# Altium PCB SDP_V2.0.PcbDoc (part 2 of 3)
Units mm, origin at the board's own origin, x right, y up, seen from the top; angles counter-clockwise.
Board outline 64 x 80 mm, 4 copper layers (Top Layer, Ground Plane, Power Plane, Bottom Layer), stack 1.466 mm thick; 154 components, 87 nets, 480 pads, 931 vias.
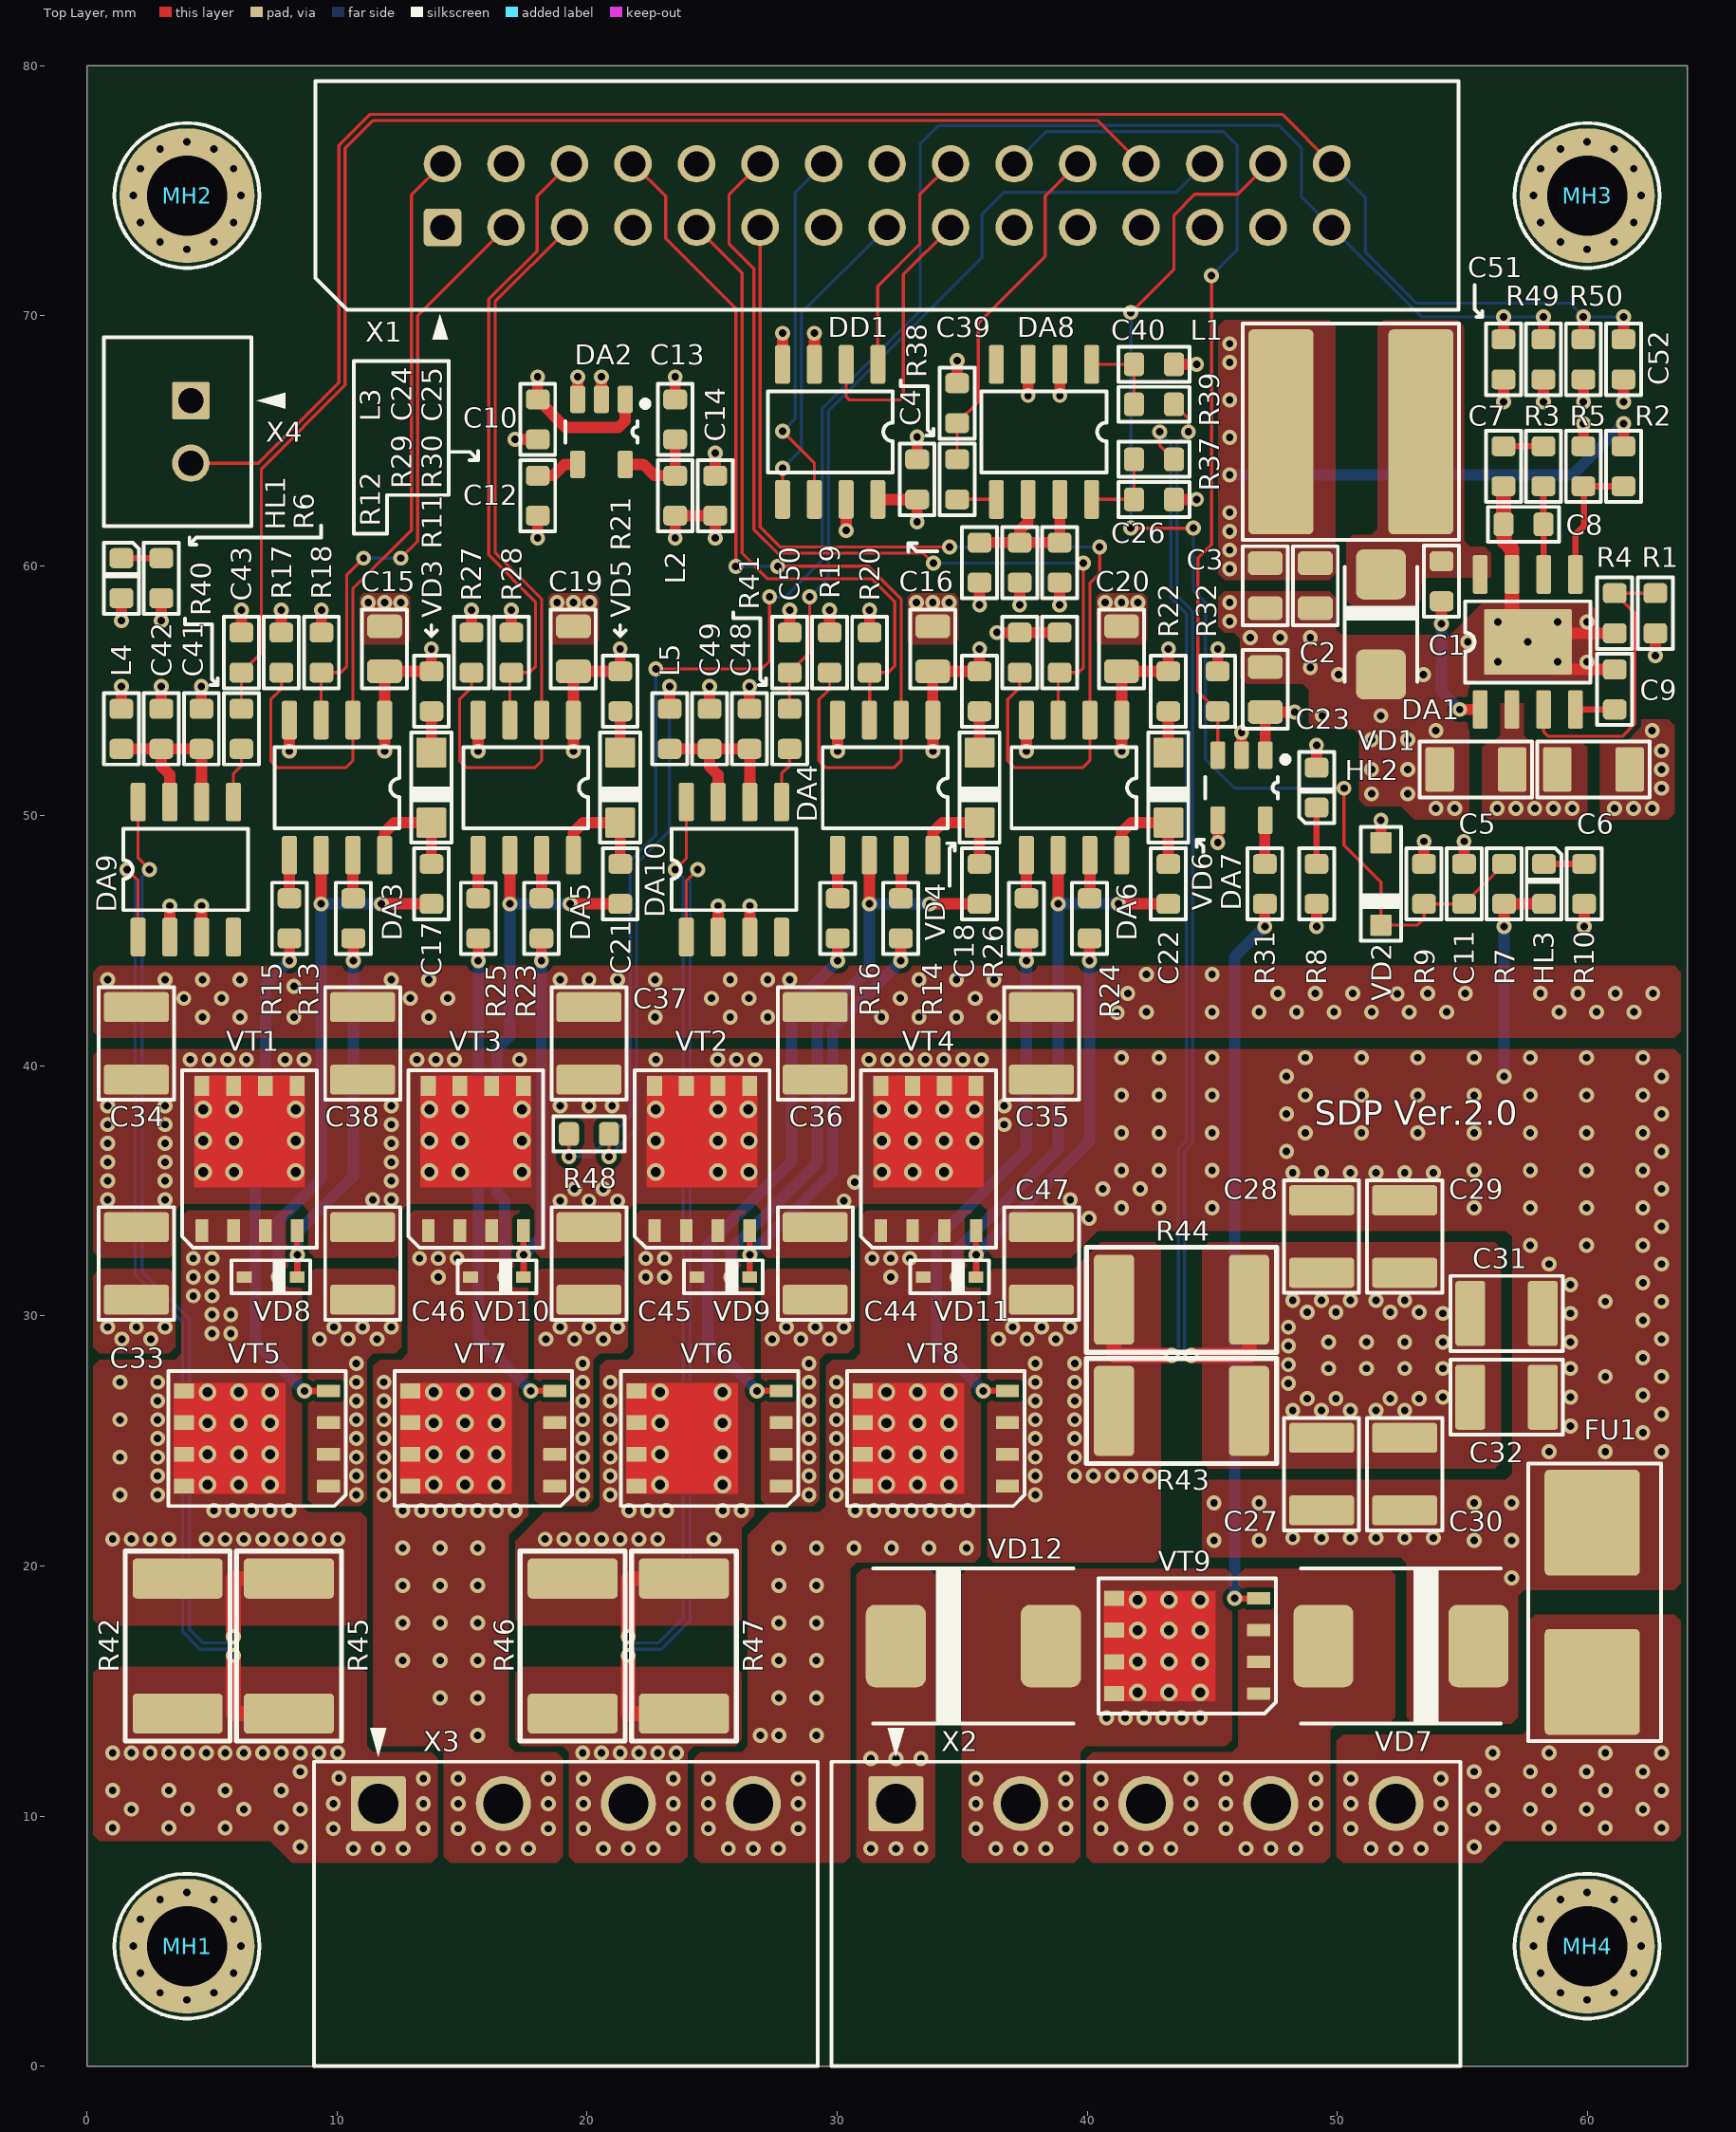
[diagram p0: Top Layer view]

## Via types
v1: diameter 0.6, hole 0.3, Top Layer to Bottom Layer, tented both sides, 789 vias
v2: diameter 0.7, hole 0.4, Top Layer to Bottom Layer, tented both sides, 94 vias
v3: diameter 0.6, hole 0.3, Top Layer to Bottom Layer, 48 vias

## Nets (pads, with @x,y where several pads share a name; then routed paths per layer and width w, separated by ;. In a path a pad name is that pad's centre, name@x,y a point inside that pad or via, vN(x,y) a via of type N, cw(c..) or ccw(c..) an arc to the next point about the centre after c; other vN are vias at no path point) (continued)
GND: (continued)
  other v1: 41.35,8.7 42.35,8.7 43.35,8.7 46.35,8.7 47.35,8.7 48.35,8.7 40.55,9.5 44.15,9.5 45.55,9.5 49.15,9.5 40.55,10.5 44.15,10.5 45.55,10.5 49.15,10.5 40.55,11.5 44.15,11.5 45.55,11.5 49.15,11.5 48.225,26.225 49.375,26.225 50.525,26.225 51.55,26.225 52.7,26.225 48.8,26.7 49.95,26.7 52.125,26.7 53.275,26.7 54.225,26.75 48.05,27.3 49.65,27.9 51.175,27.9 52.7,27.9 54.225,27.9 48.05,28.05 48.05,28.8 49.65,28.95 51.175,28.95 52.7,28.95 54.225,28.95 1.4,29.075 2.55,29.075 0.825,29.55 1.975,29.55 3.125,29.55 48.05,29.55 54.225,30.1 48.8,30.15 49.95,30.15 52.125,30.15 53.275,30.15 48.225,30.625 49.375,30.625 50.525,30.625 51.55,30.625 52.7,30.625 4.625,41.95 6.125,41.95 8.275,41.95 13.675,41.95 22.725,41.95 25.725,41.95 27.225,41.95 31.775,41.95 33.275,41.95 34.775,41.95 36.275,41.95 41.2,42.125 42.375,42.15 45,42.15 46.875,42.15 48.375,42.15 49.875,42.15 51.375,42.15 52.875,42.15 54.375,42.15 58.875,42.15 60.375,42.15 61.875,42.15 3.875,42.7 5.375,42.7 12.925,42.7 14.425,42.7 24.975,42.7 26.475,42.7 32.525,42.7 35.525,42.7 52.4,42.875 41.625,42.9 47.625,42.9 49.125,42.9 50.625,42.9 53.625,42.9 55.125,42.9 58.125,42.9 59.625,42.9 61.125,42.9 62.625,42.9 8.275,43.175 0.825,43.45 3.125,43.45 4.625,43.45 6.125,43.45 12.175,43.45 13.675,43.45 18.925,43.45 20.075,43.45 21.225,43.45 22.725,43.45 25.725,43.45 27.225,43.45 28.1,43.45 33.275,43.45 34.775,43.45 36.275,43.45 42.375,43.65 45,43.65 53.95,50.3 54.7,50.3 61.1,50.3 61.85,50.3 62.6,50.3 51.375,50.875 52.825,50.875 62.975,51.1 51.375,51.85 52.825,51.85 62.975,51.85 62.975,52.6 51.375,53.05 52.825,53.05 53.95,53.4 62.6,53.4 49.4,54 51.75,54 50.05,55.65 53.45,55.65 48.925,55.925 56.425,56.15 58.825,56.15 60,56.15 55.225,56.95 46.525,57.125 47.725,57.125 48.925,57.125 56.425,57.75 58.825,57.75 60,57.75 45.7,57.775 11.25,58.525 11.9,58.525 12.55,58.525 18.8,58.525 19.45,58.525 20.1,58.525 33.175,58.525 33.825,58.525 34.475,58.525 40.725,58.525 41.375,58.525 42.025,58.525 45.7,58.525
  other v3: 4,2.65 60,2.65 2.925,2.938 5.075,2.938 58.925,2.938 61.075,2.938 2.138,3.725 5.862,3.725 58.138,3.725 61.862,3.725 1.85,4.8 6.15,4.8 57.85,4.8 62.15,4.8 2.138,5.875 5.862,5.875 58.138,5.875 61.862,5.875 2.925,6.662 5.075,6.662 58.925,6.662 61.075,6.662 4,6.95 60,6.95 4,72.65 60,72.65 2.925,72.938 5.075,72.938 58.925,72.938 61.075,72.938 2.138,73.725 5.862,73.725 58.138,73.725 61.862,73.725 1.85,74.8 6.15,74.8 57.85,74.8 62.15,74.8 2.138,75.875 5.862,75.875 58.138,75.875 61.862,75.875 2.925,76.662 5.075,76.662 58.925,76.662 61.075,76.662 4,76.95 60,76.95
I0_P: C43.2 R40.1 X1.24 X5.24 | length 57.1
  Top Layer w0.125: R40.1@6.175,54.275 C43.2@6.175,55.725 6.975,56.525 6.975,63.871 10.325,67.221 10.325,67.425 10.325,76.696 11.429,77.8 40.43,77.8 X1.24@42.16,76.07
I1_P: C50.2 R41.1 X1.26 X5.26 | length 32.7
  Top Layer w0.125: R41.1@28.1,54.275 C50.2@28.1,55.725 28.9,56.525 v1(28.9,58.75)
  Bottom Layer w0.125: v1(28.9,58.75) 29.65,59.5 29.65,66.175 35.8,72.325 35.8,74.05 36.675,74.925 43.555,74.925 X1.26@44.7,76.07
I_BOT_N: NT4.1 R39.2 | length 38.3
  Top Layer w0.125: R39.2@43.475,66.45 44.05,65.875 v1(44.05,65.35)
  Bottom Layer w0.125: NT4.1@43.9,28.925 43.9,36.577 44.225,36.902 44.225,58.179 43.6,58.804 43.6,64.9 v1(44.05,65.35)
I_BOT_P: NT1.1 R37.2 | length 38.3
  Top Layer w0.125: v1(42.9,65.35) 42.9,64.825 R37.2@43.475,64.25
  Bottom Layer w0.125: v1(42.9,65.35) 43.35,64.9 43.35,58.7 43.975,58.075 43.975,37.005 43.65,36.68 NT1.1@43.65,28.925
I_common: C39.2 R38.1 X1.22 X5.22 | length 13.8
  Top Layer w0.125: R38.1@34.8,64.25 C39.2@34.8,65.7 35.65,66.55 35.65,69.7 38.325,72.375 38.325,74.775 X1.22@39.62,76.07
I_PH_X1_N: DA9.1 NT3.1 | length 36.1
  Top Layer w0.125: v1(1.6,47.85) 2.045,47.405 DA9.1@2.045,45.15
  Bottom Layer w0.125: v1(1.6,47.85) 1.925,47.525 1.925,31.65 3.825,29.75 3.825,17.375 4.525,16.675 NT3.1@5.35,16.675
I_PH_X1_P: DA9.8 NT2.2 | length 35.7
  Top Layer w0.125: DA9.8@2.045,50.55 2.045,48.305 v1(2.5,47.85)
  Bottom Layer w0.125: v1(2.5,47.85) 2.2,47.55 2.2,31.775 4.1,29.875 4.1,17.475 4.65,16.925 NT2.2@5.35,16.925
I_PH_Y1_N: DA10.1 NT6.1 | length 35.5
  Top Layer w0.125: DA10.1@23.97,45.15 23.97,47.395 v1(24.425,47.85)
  Bottom Layer w0.125: NT6.1@22.15,16.675 22.975,16.675 24.125,17.825 24.125,47.55 v1(24.425,47.85)
I_PH_Y1_P: DA10.8 NT5.2 | length 35.1
  Top Layer w0.125: v1(23.525,47.85) 23.97,48.295 DA10.8@23.97,50.55
  Bottom Layer w0.125: NT5.2@22.15,16.925 22.85,16.925 23.85,17.925 23.85,47.525 v1(23.525,47.85)
MP_UX1: C17.2 DA3.6 NT2.1 R42.2 R45.2 VD8.2 VT1.1 VT1.2 VT1.3 VT5.5 VT5.6 VT5.7 VT5.8 | length 26.9
  Top Layer w0.45: v1(9.365,46.475) DA3.6@9.365,48.425 ; v1(11.775,46.475) C17.2@13.775,46.475
  Top Layer w0.6: v1(5.85,17.175) 5.85,19.5 R45.2@8.075,19.5
  Bottom Layer w0.125: NT2.1@5.6,16.925 v1(5.85,17.175)
  Bottom Layer w0.45: v1(7.65,31.55) 7.65,33.775 9.365,35.49 v1(9.365,46.475) v1(11.775,46.475)
  other v1: 1.025,21.075 1.775,21.075 2.525,21.075 3.275,21.075 4.775,21.075 5.525,21.075 6.275,21.075 7.025,21.075 7.775,21.075 8.525,21.075 9.275,21.075 10.025,21.075 5.075,22.225 5.825,22.225 6.575,22.225 7.325,22.225 8.075,22.225 1.325,22.85 2.825,22.85 2.825,23.6 1.325,24.35 2.825,24.35 2.825,25.1 1.325,25.85 2.825,25.85 2.825,26.6 1.325,27.35 2.825,27.35 5,29.3 5.75,29.3 5,30.05 5.75,30.05 4.25,30.8 5,30.8 4.25,31.55 5,31.55 4.25,32.3 5,32.3
  other v2: 4.825,23.25 6.075,23.25 7.325,23.25 4.825,24.475 6.075,24.475 7.325,24.475 4.825,25.725 6.075,25.725 7.325,25.725 4.825,26.95 6.075,26.95 7.325,26.95
MP_UX1_OUT: NT3.2 R42.1 R45.1 X3.1 | length 4.9
  Top Layer w0.6: v1(5.85,16.425) 5.85,14.1 R45.1@8.075,14.1
  Bottom Layer w0.125: NT3.2@5.6,16.675 v1(5.85,16.425)
  other v1: 10.65,8.7 11.65,8.7 12.65,8.7 8.525,8.775 9.85,9.5 13.45,9.5 1.025,9.525 3.275,9.525 5.525,9.525 7.775,9.525 1.775,10.275 4.025,10.275 6.275,10.275 8.525,10.275 9.85,10.5 13.45,10.5 1.025,11.025 3.275,11.025 5.525,11.025 7.775,11.025 13.45,11.5 10.075,11.525 8.525,11.775 1.025,12.525 1.775,12.525 2.525,12.525 3.275,12.525 4.025,12.525 4.775,12.525 5.525,12.525 6.275,12.525 7.025,12.525 7.775,12.525 8.525,12.525 9.275,12.525 10.025,12.525
MP_VX2: C21.2 DA5.6 VD10.2 VT3.1 VT3.2 VT3.3 VT7.5 VT7.6 VT7.7 VT7.8 X3.2 | length 21.6
  Top Layer w0.45: v1(16.915,46.475) DA5.6@16.915,48.425 ; v1(19.325,46.475) C21.2@21.325,46.475
  Bottom Layer w0.45: v1(16.7,31.55) 16.7,34.625 16.4,34.925 16.4,40.675 16.915,41.19 v1(16.915,46.475) v1(19.325,46.475)
  other v1: 15.65,8.7 16.65,8.7 17.65,8.7 14.85,9.5 18.45,9.5 14.85,10.5 18.45,10.5 14.85,11.5 18.45,11.5 15.625,13.225 14.125,14.725 15.625,14.725 12.625,16.225 14.125,16.225 15.625,16.225 12.625,17.725 14.125,17.725 15.625,17.725 12.625,19.225 14.125,19.225 15.625,19.225 12.625,20.725 14.125,20.725 15.625,20.725 12.625,22.225 13.375,22.225 14.125,22.225 14.875,22.225 15.625,22.225 16.375,22.225 17.125,22.225 11.875,22.85 11.875,23.6 11.875,24.35 11.875,25.1 11.875,25.85 11.875,26.6 11.875,27.35 14.05,31.55 13.3,32.3 14.05,32.3 14.8,32.3
  other v2: 13.875,23.25 15.125,23.25 16.375,23.25 13.875,24.475 15.125,24.475 16.375,24.475 13.875,25.725 15.125,25.725 16.375,25.725 13.875,26.95 15.125,26.95 16.375,26.95
MP_WY1: C18.2 DA4.6 NT5.1 R46.2 R47.2 VD9.2 VT2.1 VT2.2 VT2.3 VT6.5 VT6.6 VT6.7 VT6.8 | length 28.5
  Top Layer w0.45: v1(31.29,46.475) DA4.6@31.29,48.425 ; v1(33.7,46.475) C18.2@35.7,46.475
  Top Layer w0.6: v1(21.65,17.175) 21.65,19.5 R47.2@23.875,19.5
  Bottom Layer w0.125: v1(21.65,17.175) NT5.1@21.9,16.925
  Bottom Layer w0.45: v1(25.745,31.555) 25.745,32.645 29.2,36.1 29.2,41.8 31.29,43.89 v1(31.29,46.475) v1(33.7,46.475)
  other v1: 18.325,21.075 19.075,21.075 19.825,21.075 20.575,21.075 21.325,21.075 22.075,21.075 22.825,21.075 25.075,21.075 21.675,22.225 22.425,22.225 23.175,22.225 25.425,22.225 26.175,22.225 20.925,22.85 20.925,23.6 20.925,24.35 20.925,25.1 20.925,25.85 20.925,26.6 20.925,27.35 22.35,31.55 23.1,31.55 22.35,32.3 23.1,32.3
  other v2: 22.925,23.25 25.425,23.25 22.925,24.475 25.425,24.475 22.925,25.725 25.425,25.725 22.925,26.95 25.425,26.95
MP_WY1_OUT: NT6.2 R46.1 R47.1 X3.3 | length 4.9
  Top Layer w0.6: v1(21.65,16.425) 21.65,14.1 R47.1@23.875,14.1
  Bottom Layer w0.125: v1(21.65,16.425) NT6.2@21.9,16.675
  other v1: 20.65,8.7 21.65,8.7 22.65,8.7 19.85,9.5 23.45,9.5 19.85,10.5 23.45,10.5 19.85,11.5 23.45,11.5 19.825,12.525 20.575,12.525 21.325,12.525 22.075,12.525 22.825,12.525 23.575,12.525
MP_Y2: C22.2 DA6.6 VD11.2 VT4.1 VT4.2 VT4.3 VT8.5 VT8.6 VT8.7 VT8.8 X3.4 | length 23
  Top Layer w0.45: v1(38.84,46.475) DA6.6@38.84,48.425 ; v1(41.25,46.475) C22.2@43.25,46.475
  Bottom Layer w0.45: v1(34.795,31.555) 34.795,32.645 38.84,36.69 v1(38.84,46.475) v1(41.25,46.475)
  other v1: 25.65,8.7 26.65,8.7 27.65,8.7 24.85,9.5 28.45,9.5 24.85,10.5 28.45,10.5 24.85,11.5 28.45,11.5 26.925,13.225 27.675,13.225 29.175,13.225 27.675,14.725 29.175,14.725 27.675,16.225 29.175,16.225 27.675,17.725 29.175,17.725 27.675,19.225 29.175,19.225 27.675,20.725 29.175,20.725 30.675,20.725 32.175,20.725 33.675,20.725 35.175,20.725 30.725,22.225 31.475,22.225 32.225,22.225 32.975,22.225 33.725,22.225 34.475,22.225 35.225,22.225 29.975,22.85 29.975,23.6 29.975,24.35 29.975,25.1 29.975,25.85 29.975,26.6 29.975,27.35 32.15,31.55 31.4,32.3 32.15,32.3 32.9,32.3
  other v2: 31.975,23.25 33.225,23.25 34.475,23.25 31.975,24.475 33.225,24.475 34.475,24.475 31.975,25.725 33.225,25.725 34.475,25.725 31.975,26.95 33.225,26.95 34.475,26.95
NetC1_1: C1.1 DA1.1 | length 5.4
  Top Layer w0.45: v1(54.175,57.675) C1.1@54.175,58.575 ; v1(54.9,54.25) DA1.1@55.72,54.25
  Bottom Layer w0.45: v1(54.175,57.675) 54.175,54.975 v1(54.9,54.25)
NetC1_2: C1.2 DA1.8 L1.1 VD1.1
NetC7_2: C7.2 R3.2 | length 1.6
  Top Layer w0.25: C7.2@56.65,64.775 R3.2@58.25,64.775
NetC8_2: C8.2 DA1.6 R3.1 | length 3.5
  Top Layer w0.25: R3.1@58.25,63.175 C8.2@58.25,61.65 58.26,61.64 DA1.6@58.26,59.65
NetC9_2: C9.2 DA1.4 | length 1.6
  Top Layer w0.25: DA1.4@59.53,54.25 C9.2@61.1,54.25
NetC12_2: C12.2 DA2.4 | length 1.8
  Top Layer w0.45: C12.2@18.025,63.6 18.65,63.6 19.1,64.05 DA2.4@19.625,64.05
NetC13_2: C13.2 DA2.5 L2.1 | length 3.6
  Top Layer w0.45: DA2.5@21.525,64.05 22.25,64.05 22.7,63.6 L2.1@23.525,63.6 C13.2@23.525,65.05
NetC17_1: C17.1 DA3.8 VD3.1 | length 4.6
  Top Layer w0.45: DA3.8@11.905,48.425 11.905,49.33 12.3,49.725 VD3.1@13.775,49.725 C17.1@13.775,48.075